# Altium PCB 拼版.PcbDoc (part 2 of 3)
Units mm, origin at the board's own origin, x right, y up, seen from the top; angles counter-clockwise.
Board outline 152.4 x 101.6 mm, 4 copper layers (Top Layer, Mid-Layer 1, Mid-Layer 2, Bottom Layer); 303 components, 0 nets, 1078 pads, 478 vias.
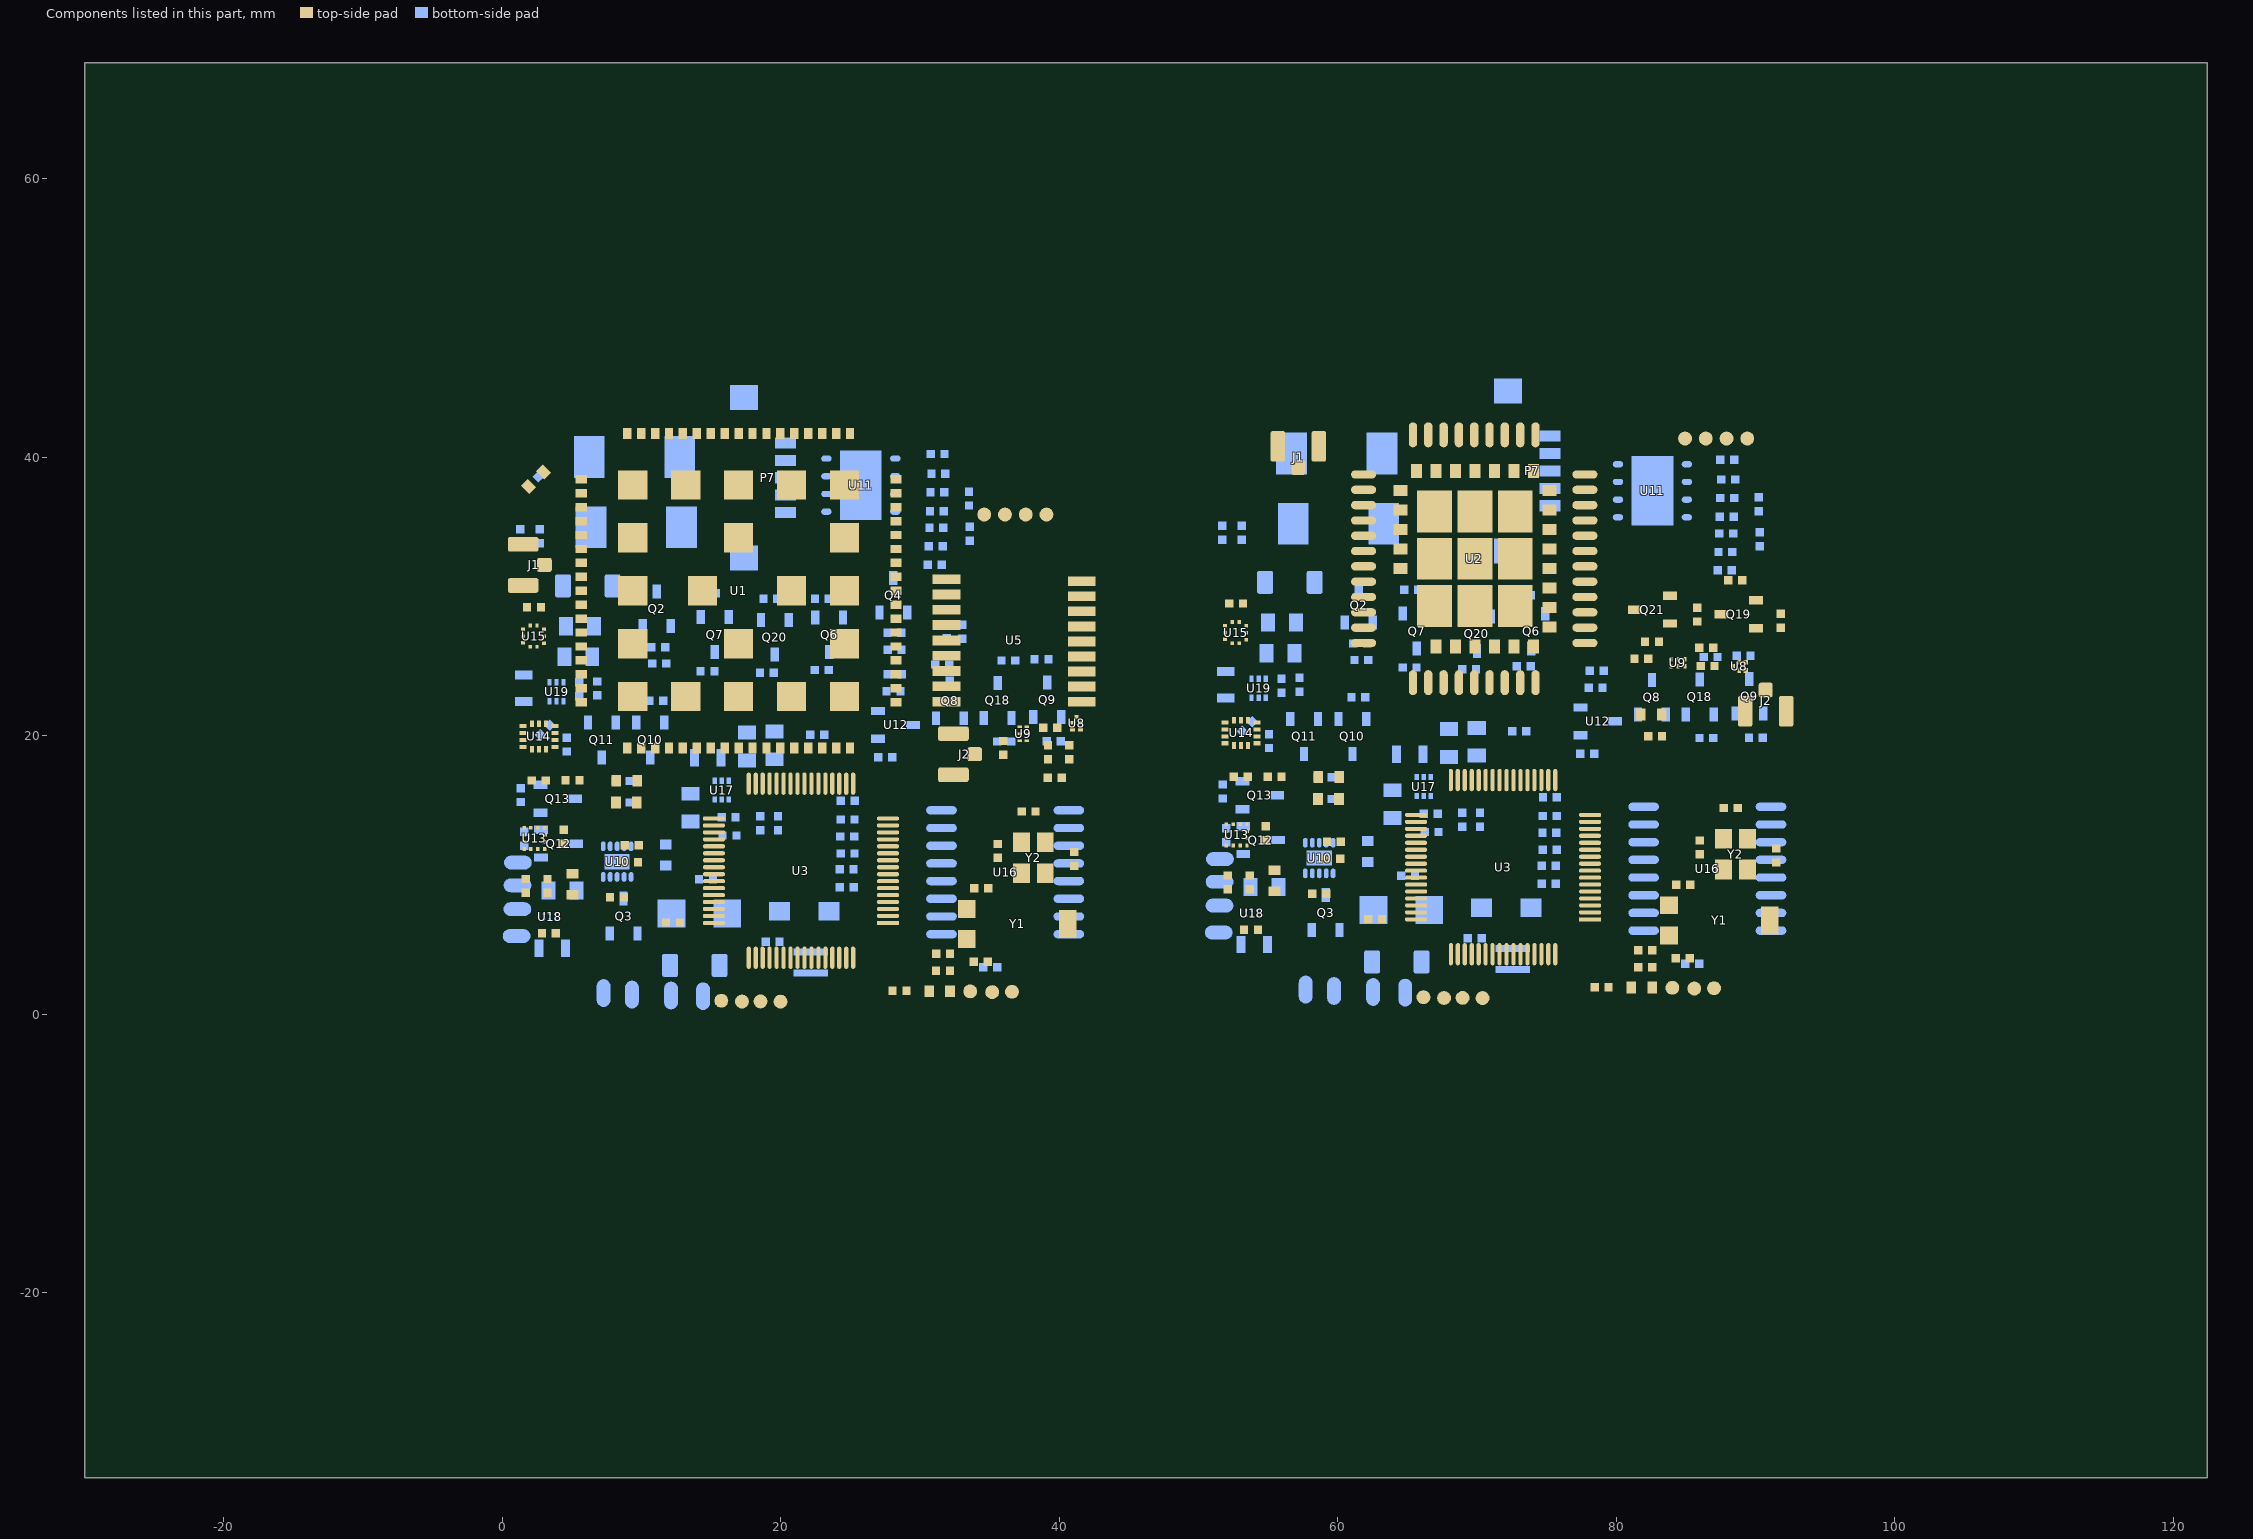
[diagram p4: the components of this part, seen from the top]

## Via types
v1: diameter 0.508, hole 0.305, Top Layer to Bottom Layer, tented both sides, 421 vias
v2: diameter 0.762, hole 0.508, Top Layer to Bottom Layer, tented both sides, 43 vias
v3: diameter 1.016, hole 0.635, Top Layer to Bottom Layer, tented both sides, 14 vias

## Nets (pads, with @x,y where several pads share a name; then routed paths per layer and width w, separated by ;. In a path a pad name is that pad's centre, name@x,y a point inside that pad or via, vN(x,y) a via of type N, cw(c..) or ccw(c..) an arc to the next point about the centre after c; other vN are vias at no path point) (continued)
copper on no net: | length 3569.3
  Top Layer w0.127: 8.805,12.144 v1(8.805,12.982) ; 9.687,16.781 10.379,16.781 ; 10.043,15.211 9.664,15.211 9.682,15.229 10.248,15.229 v1(10.667,14.81) ; 10.657,16.503 10.379,16.781 ; v1(11.082,16.078) 10.379,16.781 ; 59.224,12.398 v1(59.224,13.236) ; 60.106,17.035 60.798,17.035 ; 60.462,15.465 60.083,15.465 60.101,15.483 60.667,15.483 v1(61.086,15.064) ; 61.076,16.757 60.798,17.035 ; v1(61.501,16.332) 60.798,17.035
  Top Layer w0.152: v1(0.795,12.255) 1.179,11.871 1.562,11.871 1.562,9.834 1.676,9.72 ; v1(1.59,21.536) 2.133,20.994 2.133,20.869 ; v1(2.483,7.739) 3.851,6.371 3.851,5.829 ; v1(2.495,25.941) 2.495,26.401 ; 2.633,20.869 v1(2.633,21.374) ; 3.007,27.164 v1(3.413,27.164) ; 3.062,11.871 3.342,11.871 v1(4.066,11.147) 3.251,10.332 3.251,9.72 ; 11.76,6.593 12.39,7.223 13.869,7.223 14.024,7.067 15.201,7.067 ; v1(12.061,9.182) 12.176,9.067 15.201,9.067 ; v1(12.42,9.741) 12.594,9.567 15.201,9.567 ; 15.201,8.567 16.02,8.567 17.522,10.069 v1@18.505,10.069 ; v1(18.201,2.609) 18.201,4.067 18.201,3.395 ; 19.701,16.567 19.701,14.662 19.334,14.295 19.334,12.195 v1(21.311,10.217) ; v1(20.701,2.224) 20.701,4.067 ; 21.201,16.567 21.201,15.343 20.694,14.837 20.694,11.792 v1(21.207,11.279) ; v1(21.214,11.937) 21.214,14.823 21.701,15.31 21.701,16.567 ; 21.701,4.067 21.701,2.324 v1(22.005,2.019) ; v1(22.373,12.642) 23.325,13.594 24.334,13.594 24.861,13.067 27.64,13.067 ; 23.201,4.067 23.201,2.579 24.088,1.691 28.027,1.691 ; 24.201,4.067 24.201,3.287 24.573,2.915 29.035,2.915 29.41,2.915 30.661,1.664 ; v1(26.08,9.506) 26.141,9.567 27.701,9.567 ; 27.64,13.006 27.701,13.067 ; 27.701,7.567 30.119,7.567 31.17,6.516 32.336,6.516 33.36,5.492 33.36,5.413 33.36,4.276 33.853,3.783 ; 27.701,8.067 30.392,8.067 31.529,6.93 32.131,6.93 32.773,7.572 33.36,7.572 33.36,8.526 33.894,9.059 ; 27.701,8.567 29.829,8.567 32.851,11.589 35.231,11.589 35.585,11.235 37.896,11.235 38.992,10.139 40.562,10.139 41.079,10.656 ; 27.701,9.067 27.785,9.067 ; 27.724,9.006 27.785,9.067 ; 32.154,4.348 32.629,4.348 33.025,3.953 33.025,3.261 33.258,3.028 34.625,3.028 34.853,3.257 34.853,3.783 ; 37.295,14.566 37.295,12.372 37.279,12.356 35.706,12.356 35.585,12.235 35.447,12.235 35.142,11.929 32.735,11.929 29.873,9.067 27.785,9.067 ; v1(40.275,22.455) 41.614,22.455 ; 40.96,20.457 40.96,20.932 41.534,20.932 v1(42.003,20.932) ; v1(51.214,12.509) 51.598,12.125 51.981,12.125 51.981,10.088 52.095,9.974 ; v1(52.009,21.79) 52.552,21.248 52.552,21.123 ; v1(52.902,7.993) 54.27,6.625 54.27,6.083 ; v1(52.914,26.195) 52.914,26.655 ; 53.052,21.123 v1(53.052,21.628) ; 53.426,27.418 v1(53.832,27.418) ; 53.481,12.125 53.761,12.125 v1(54.485,11.401) 53.67,10.586 53.67,9.974 ; 62.179,6.847 62.809,7.477 64.288,7.477 64.443,7.321 65.62,7.321 ; v1(62.48,9.436) 62.595,9.321 65.62,9.321 ; v1(62.839,9.995) 63.013,9.821 65.62,9.821 ; 65.62,8.821 66.439,8.821 67.941,10.323 v1@68.924,10.323 ; 66.949,36.12 69.849,36.12 ; 67.049,26.42 67.049,29.22 66.949,29.32 ; v1(68.62,2.863) 68.62,4.321 68.62,3.649 ; 70.12,16.821 70.12,14.916 69.753,14.549 69.753,12.449 v1(71.73,10.471) ; v1(71.12,2.478) 71.12,4.321 ; 71.249,26.42 72.649,26.42 72.649,29.22 72.749,29.32 ; 71.62,16.821 71.62,15.597 71.113,15.091 71.113,12.046 v1(71.626,11.533) ; v1(71.633,12.191) 71.633,15.077 72.12,15.564 72.12,16.821 ; 72.12,4.321 72.12,2.578 v1(72.424,2.273) ; v1(72.792,12.896) 73.744,13.848 74.753,13.848 75.28,13.321 78.059,13.321 ; 73.62,4.321 73.62,2.833 74.507,1.945 78.446,1.945 ; 74.62,4.321 74.62,3.541 74.992,3.169 79.454,3.169 79.829,3.169 81.08,1.918 ; 75.2,30.629 74.059,30.629 72.749,29.32 ; v1(76.499,9.76) 76.56,9.821 78.12,9.821 ; 78.059,13.26 78.12,13.321 ; 78.12,7.821 80.538,7.821 81.589,6.77 82.755,6.77 83.779,5.746 83.779,5.667 83.779,4.53 84.272,4.037 ; 78.12,8.321 80.811,8.321 81.948,7.184 82.55,7.184 83.192,7.826 83.779,7.826 83.779,8.78 84.313,9.313 ; 78.12,8.821 80.248,8.821 83.27,11.843 85.65,11.843 86.004,11.489 88.315,11.489 89.411,10.393 90.981,10.393 91.498,10.91 ; 78.12,9.321 78.204,9.321 ; 78.143,9.26 78.204,9.321 ; 82.573,4.602 83.048,4.602 83.444,4.207 83.444,3.515 83.677,3.282 85.044,3.282 85.272,3.511 85.272,4.037 ; 83.93,24.998 84.43,24.998 ; 87.714,14.82 87.714,12.626 87.698,12.61 86.125,12.61 86.004,12.489 85.866,12.489 85.561,12.183 83.154,12.183 80.292,9.321 78.204,9.321 ; 88.817,25.281 88.817,24.706 89.292,24.706 ; 66.949,29.32 69.849,29.32 ; 66.949,29.32 66.949,32.72 69.849,32.72 ; 69.849,29.32 69.849,32.72 ; 69.849,29.32 72.749,29.32 ; 69.849,32.72 69.849,36.12 ; 69.849,32.72 72.749,32.72 ; 69.849,36.12 72.749,36.12 72.749,32.72 ; 72.749,29.32 72.749,32.72
  Top Layer w0.203: v1@2.337,6.735 v1(2.252,6.82) 2.252,6.428 2.851,5.829 ; 2.953,38.964 4.255,40.266 5.238,40.266 5.673,39.83 5.673,38.42 ; v1(7.222,16.27) 7.733,16.781 8.187,16.781 ; v1(7.75,13.017) 7.75,11.969 8.748,10.971 8.748,10.912 ; v1(8.139,15.894) 8.139,15.236 8.164,15.211 ; 8.741,8.401 9.891,7.251 ; 9.805,12.144 10.417,12.144 v1(10.491,12.069) ; v1(11.116,13.294) 12.344,12.067 15.201,12.067 ; v1@11.691,13.555 v1(11.691,13.674) 12.798,12.567 15.201,12.567 ; v1(11.874,14.428) 13.235,13.067 15.201,13.067 ; 15.201,8.067 16.361,8.067 v1(17.373,9.079) ; v1(17.685,13.207) 17.701,13.222 17.701,16.567 ; 19.201,4.067 19.201,2.947 v1(19.908,2.239) ; 22.201,16.567 22.201,15.306 21.561,14.666 21.561,12.693 22.262,11.992 v1(22.798,11.992) ; 24.201,16.567 24.201,17.377 25.204,18.381 v2(25.925,18.381) ; v1(24.332,6.225) 25.201,5.356 25.201,4.067 ; 25.24,4.028 25.201,3.988 27.548,3.988 27.908,4.348 31.154,4.348 31.154,3.124 31.152,3.122 ; v1(26.967,31.91) 27.458,31.42 28.273,31.42 ; v1(27.514,32.42) 28.273,32.42 ; 27.701,12.567 v1@29.082,12.567 ; v1(30.328,26.863) 30.336,26.855 31.914,26.855 ; 37.663,20.148 37.988,20.148 v1(38.358,19.779) ; v1(40.243,25.629) 40.312,25.698 41.614,25.698 ; v1@52.756,6.989 v1(52.671,7.074) 52.671,6.682 53.27,6.083 ; v1(57.641,16.524) 58.152,17.035 58.606,17.035 ; v1(58.169,13.271) 58.169,12.223 59.167,11.225 59.167,11.166 ; v1(58.558,16.148) 58.558,15.49 58.583,15.465 ; 59.16,8.655 60.31,7.505 ; v1@60.21,35.47 61.849,35.47 ; 60.224,12.398 60.836,12.398 v1(60.91,12.323) ; v1(60.253,34.37) 61.849,34.37 ; v1(61.535,13.548) 62.763,12.321 65.62,12.321 ; v1@62.11,13.809 v1(62.11,13.928) 63.217,12.821 65.62,12.821 ; v1(62.293,14.682) 63.654,13.321 65.62,13.321 ; 65.62,8.321 66.78,8.321 v1(67.792,9.333) ; v1@68.12,13.476 68.12,16.821 ; 69.62,4.321 69.62,3.201 v1(70.327,2.493) ; 72.62,16.821 72.62,15.56 71.98,14.92 71.98,12.947 72.681,12.246 v1(73.217,12.246) ; 73.099,23.82 73.099,22.836 73.66,22.276 79.172,22.276 79.629,22.733 81.229,22.733 81.763,22.2 81.763,21.615 81.763,21.539 ; 74.62,16.821 74.62,17.631 75.623,18.635 v2(76.344,18.635) ; v1(74.751,6.479) 75.62,5.61 75.62,4.321 ; 75.659,4.282 75.62,4.242 77.967,4.242 78.327,4.602 81.573,4.602 81.573,3.378 81.571,3.376 ; 78.12,12.821 v1@79.501,12.821 ; v1(79.654,29.388) 79.975,29.067 81.345,29.067 81.345,28.357 82.067,27.635 82.067,26.746 ; 82.305,25.527 83.9,25.527 83.93,25.498 ; 84.93,24.998 86.034,24.998 86.055,25.019 ; 89.036,31.166 v1(89.891,31.166)
  Top Layer w0.254: v1(0.9,20.209) 1.483,20.209 ; v1(1.089,28.337) 1.089,28.057 1.482,27.664 1.482,27.164 ; 1.483,19.709 1.483,20.709 ; 1.562,13.396 2.062,13.396 ; 1.676,8.72 2.577,8.72 ; 1.893,37.903 v1(2.572,37.224) ; 1.995,26.401 1.762,26.401 1.482,26.681 0.354,26.681 0.336,26.699 ; 2.098,16.812 1.7,17.211 1.7,17.365 ; 2.113,16.463 2.113,15.908 ; 2.133,19.049 2.133,18.938 1.7,18.505 1.7,17.365 ; 2.495,27.926 2.495,28.284 1.778,29.001 1.778,29.246 1,29.246 0.336,28.582 0.336,26.699 ; 2.562,13.396 2.562,13.133 2.812,12.883 3.075,12.883 3.676,12.883 4.052,13.259 4.411,13.259 ; 3.007,26.664 3.007,26.29 v1(3.4,25.897) ; 3.007,27.664 3.157,27.813 v1(3.157,28.388) ; 3.075,12.383 3.664,12.383 3.788,12.259 4.411,12.259 ; 3.113,16.797 3.113,16.813 2.113,17.813 2.113,18.327 2.633,18.847 2.633,19.049 3.133,19.049 ; 3.133,20.869 3.133,21.208 3.781,21.857 3.781,22.933 3.375,23.339 2.112,23.339 1.757,22.984 0.371,22.984 0.336,22.949 ; 3.351,8.72 3.251,8.72 ; 3.351,8.82 3.251,8.72 ; 4.544,16.811 4.544,16.356 4.544,15.375 v1(5.321,14.598) ; 5.037,10.094 4.916,10.094 3.745,8.922 3.453,8.922 3.251,8.72 ; 5.544,16.811 5.583,16.851 5.583,17.91 ; 5.583,17.379 5.583,17.91 ; v1(8.071,17.919) 8.476,17.919 8.973,18.416 8.973,19.12 ; 10.973,19.12 10.973,19.681 11.135,19.843 ; 11.973,19.12 11.973,18.322 v1(12.407,17.889) ; v1@12.253,20.961 11.135,19.843 ; v1(12.424,21.132) 11.135,19.843 ; v1(14.788,17.858) 15.567,17.858 17.807,17.858 18.201,17.464 18.201,16.567 ; 15.201,7.067 17.142,7.067 v1(17.934,6.274) ; 15.201,7.567 17.757,7.567 v1(18.195,7.129) ; v1(16.067,20.53) 16.973,19.624 16.973,19.12 ; 17.701,4.067 17.688,4.054 17.688,1.961 18.544,1.105 18.544,0.932 ; 17.973,19.12 17.973,20.809 v1(18.546,21.382) ; v1(22.138,14.028) 22.848,14.028 23.201,14.38 23.201,16.567 ; 22.185,4.016 v1(22.185,6.08) ; v1(22.687,14.643) 22.701,14.657 22.701,16.567 ; 22.701,4.067 22.701,5.65 v1(22.702,5.652) ; 22.973,19.12 22.973,20.219 23.243,20.489 23.829,20.489 v1(23.842,20.475) ; v1(23.335,6.237) 24.701,4.872 24.701,4.067 ; 23.973,19.12 23.973,19.717 24.63,20.373 v1(24.63,20.8) ; 24.701,16.567 24.701,14.916 24.967,14.649 25.456,14.649 v1(25.77,14.963) ; 25.201,16.567 26.412,16.567 v1(26.979,17.133) ; v1@25.266,11.963 25.266,10.813 26.013,10.067 27.701,10.067 ; v1(25.89,5.036) 25.89,5.846 26.61,6.567 27.701,6.567 ; v1(26.453,11.913) 26.606,12.067 27.701,12.067 ; v1(26.502,13.567) 27.701,13.567 ; 27.701,14.067 27.701,16.476 v1@28.223,16.998 ; 28.273,28.42 v1(29.985,28.42) ; 28.273,35.42 28.836,35.42 28.936,35.319 v1(29.515,35.319) ; 28.273,36.42 28.851,36.42 29.218,36.787 30.414,36.787 31.021,36.179 31.231,35.97 32.086,35.97 32.713,36.597 32.713,38.648 v1(31.822,39.54) ; 28.273,37.42 31.136,37.42 v1(31.752,36.804) ; 31.914,29.055 v1(33.907,29.055) ; 31.914,30.155 34.332,30.155 v1(34.87,29.617) ; 32.152,3.122 32.161,3.114 32.161,1.664 ; 34.61,35.891 35.103,35.397 v1(35.103,34.817) ; 35.966,19.634 37.148,19.634 37.163,19.648 ; 37.163,20.148 37.163,20.648 37.163,22.072 v1(37.344,22.253) ; 37.663,19.648 37.663,18.708 38.043,18.327 39.187,18.327 ; 37.663,20.648 38.774,20.648 38.85,20.573 ; v1(38.365,19.036) 38.657,19.327 39.187,19.327 ; 39.482,22.876 ccw(c41.001,22.876) 41.244,21.377 ; 39.85,20.573 40.39,20.032 41.363,20.032 41.535,20.204 41.535,20.457 ; v1(51.319,20.463) 51.902,20.463 ; v1(51.508,28.591) 51.508,28.311 51.901,27.918 51.901,27.418 ; 51.902,19.963 51.902,20.963 ; 51.981,13.65 52.481,13.65 ; 52.095,8.974 52.996,8.974 ; 52.414,26.655 52.181,26.655 51.901,26.935 50.773,26.935 50.755,26.953 ; 52.517,17.066 52.119,17.465 52.119,17.619 ; 52.532,16.717 52.532,16.162 ; 52.552,19.303 52.552,19.192 52.119,18.759 52.119,17.619 ; 52.914,28.18 52.914,28.538 52.197,29.255 52.197,29.5 51.419,29.5 50.755,28.836 50.755,26.953 ; 52.981,13.65 52.981,13.387 53.231,13.137 53.494,13.137 54.095,13.137 54.471,13.513 54.83,13.513 ; 53.426,26.918 53.426,26.544 v1(53.819,26.151) ; 53.426,27.918 53.576,28.067 v1(53.576,28.642) ; 53.494,12.637 54.083,12.637 54.207,12.513 54.83,12.513 ; 53.532,17.051 53.532,17.067 52.532,18.067 52.532,18.581 53.052,19.101 53.052,19.303 53.552,19.303 ; 53.552,21.123 53.552,21.462 54.2,22.111 54.2,23.187 53.794,23.593 52.531,23.593 52.176,23.238 50.79,23.238 50.755,23.203 ; 53.77,8.974 53.67,8.974 ; 53.77,9.074 53.67,8.974 ; 54.963,17.065 54.963,16.61 54.963,15.629 v1(55.74,14.852) ; 55.456,10.348 55.335,10.348 54.164,9.176 53.872,9.176 53.67,8.974 ; 55.963,17.065 56.002,17.105 56.002,18.164 ; 56.002,17.633 56.002,18.164 ; v1(60.122,36.551) 60.141,36.57 61.849,36.57 ; v1(65.207,18.112) 65.986,18.112 68.226,18.112 68.62,17.718 68.62,16.821 ; 65.62,7.321 67.561,7.321 v1(68.353,6.528) ; 65.62,7.821 68.176,7.821 v1(68.614,7.383) ; 68.12,4.321 68.107,4.308 68.107,2.215 68.963,1.359 68.963,1.186 ; v1(68.809,22.327) 68.809,22.276 69.393,21.692 70.663,21.692 70.899,21.928 70.899,23.82 ; 71.999,41.62 71.999,40.396 v2(72.009,40.386) ; v1(72.557,14.282) 73.267,14.282 73.62,14.634 73.62,16.821 ; 72.604,4.27 v1(72.604,6.334) ; 73.12,4.321 73.12,5.904 v1(73.121,5.906) ; v1@73.12,14.911 73.12,16.821 ; v1(73.754,6.491) 75.12,5.126 75.12,4.321 ; 75.12,16.821 75.12,15.17 75.386,14.903 75.875,14.903 v1(76.189,15.217) ; 75.62,16.821 76.831,16.821 v1(77.398,17.387) ; v1@75.685,12.217 75.685,11.067 76.432,10.321 78.12,10.321 ; v1(76.309,5.29) 76.309,6.1 77.029,6.821 78.12,6.821 ; v1(76.872,12.167) 77.025,12.321 78.12,12.321 ; v1(76.921,13.821) 78.12,13.821 ; 77.749,26.67 v1(79.019,26.67) ; 77.749,27.77 v1(79.662,27.77) v1@79.68,27.788 ; 77.749,32.17 77.787,32.207 79.299,32.207 79.502,32.004 v1(79.502,31.267) ; 77.749,33.27 79.752,33.27 v1(79.781,33.299) ; 78.12,14.321 78.12,16.73 v1@78.642,17.252 ; 82.571,3.376 82.58,3.368 82.58,1.918 ; 83.067,26.746 85.09,26.746 85.522,26.314 85.97,26.314 ; 83.263,21.539 83.263,19.988 83.287,19.964 ; 83.845,30.067 85.071,30.067 v1(85.09,30.048) ; 84.43,25.498 v1(84.43,26.137) ; 84.93,25.498 84.93,25.781 85.436,25.781 85.97,26.314 ; 84.938,41.351 v1(84.938,42.418) ; 85.827,26.772 v1@85.827,27.254 ; 85.827,28.21 v1@85.827,27.254 ; 87.055,25.019 88.367,25.019 88.392,24.994 ; 87.543,28.737 87.543,29.91 87.935,30.302 87.935,31.064 88.036,31.166 ; v1(88.925,29.693) 88.97,29.737 90.043,29.737 ; 90.043,27.737 91.796,27.737 91.821,27.762 ; 91.862,28.804 91.821,28.762 89.544,28.762 88.036,27.254 v1@85.827,27.254 ; 0.336,22.949 0.336,26.699 ; 0.336,22.949 0.336,18.021 0.991,17.365 1.7,17.365 ; 2.062,13.396 2.062,12.955 2.562,12.455 2.562,11.871 2.562,8.734 2.577,8.72 ; 2.062,13.396 2.113,13.447 2.113,15.908 ; 2.113,15.908 2.87,15.908 2.873,15.911 3.518,15.911 3.823,16.216 3.823,18.363 3.783,18.403 3.783,19.209 4.284,19.209 5.583,17.91 ; 2.577,8.72 3.251,8.72 ; 50.755,23.203 50.755,26.953 ; 50.755,23.203 50.755,18.275 51.41,17.619 52.119,17.619 ; 52.481,13.65 52.481,13.209 52.981,12.709 52.981,12.125 52.981,8.988 52.996,8.974 ; 52.481,13.65 52.532,13.701 52.532,16.162 ; 52.532,16.162 53.289,16.162 53.292,16.165 53.937,16.165 54.242,16.47 54.242,18.617 54.202,18.657 54.202,19.463 54.703,19.463 56.002,18.164 ; 52.996,8.974 53.67,8.974 ; v1@85.827,27.254 85.827,26.457 85.97,26.314
  Top Layer w0.381: 12.76,6.567 15.201,6.567 15.201,5.702 v2(15.609,5.294) ; 28.273,34.42 29.398,34.42 29.8,34.018 v1(29.8,32.297) ; 39.482,22.876 cw(c40.142,22.876) 40.142,23.536 41.614,23.536 ; v1(39.867,26.734) 39.912,26.779 41.614,26.779 ; 40.706,19.313 41.629,19.313 v1(41.905,19.038) ; 63.179,6.821 65.62,6.821 65.62,5.956 v2(66.028,5.548) ; 74.049,26.42 74.942,25.527 81.305,25.527 ; 83.845,28.219 83.845,28.067 84.506,28.067 84.836,28.397 84.836,28.702 84.836,28.804 85.242,29.21 85.827,29.21 ; 89.292,25.281 cw(c89.292,23.844) 90.729,23.844 90.729,23.293
  Top Layer w0.508: 3.029,32.275 4.025,31.279 ccw(c4.044,31.298) 4.044,31.272 4.346,30.97 ccw(c5.673,32.297) 5.673,30.42 ; v2@5.037,7.391 5.037,8.594 ; 19.98,0.911 v1@23.023,0.911 ; v2@30.553,23.555 31.914,23.555 ; 33.924,18.682 33.973,18.634 35.966,18.634 ; 39.182,16.998 39.187,17.003 39.187,18.327 40.692,18.327 40.706,18.313 ; v2@55.456,7.645 55.456,8.848 ; 57.167,39.017 57.167,39.262 57.167,38.449 ccw(c59.707,38.449) 57.911,36.653 58.445,36.119 cw(c57.096,34.77) 59.004,34.77 59.004,29.463 ccw(c61.086,29.463) 59.614,27.991 ccw(c60.147,28.524) 59.751,27.882 ccw(c60.147,28.524) 60.147,27.77 61.849,27.77 ; 70.399,1.165 v1@73.442,1.165 ; 71.999,23.82 71.999,21.396 72.667,20.729 v1(74.261,20.729)
  Mid-Layer 1 w0.152: v1(1.59,21.536) 2.933,20.194 2.933,18.258 6.416,14.774 8.557,14.774 11.421,11.911 11.421,9.822 v1(12.061,9.182) ; v1(2.633,21.374) 3.401,20.605 3.401,18.223 6.516,15.107 8.634,15.107 11.975,11.766 11.975,10.185 v1(12.42,9.741) ; v1(18.201,2.609) 17.468,3.341 17.468,4.47 20.181,7.184 31.909,7.184 34.601,9.875 34.601,11.765 v1(32.986,13.38) ; v1(18.52,10.054) 20.79,7.785 27.25,7.785 31.962,7.785 34.23,10.053 34.23,11.443 32.271,13.402 32.271,13.935 v1(32.986,14.65) ; v1(20.701,2.224) 21.53,1.394 22.203,1.394 24.722,3.914 33.515,3.914 35.39,5.789 v1(38.887,5.789) ; v1(21.311,10.217) 21.816,10.217 21.973,10.375 v1(33.579,10.375) ; v1(22.005,2.019) 24.403,4.417 33.164,4.417 35.115,6.369 38.145,6.369 v1(38.806,7.03) ; v1(52.009,21.79) 53.352,20.448 53.352,18.512 56.835,15.028 58.976,15.028 61.84,12.165 61.84,10.076 v1(62.48,9.436) ; v1(53.052,21.628) 53.82,20.859 53.82,18.477 56.935,15.361 59.053,15.361 62.394,12.02 62.394,10.439 v1(62.839,9.995) ; v1(68.62,2.863) 67.887,3.595 67.887,4.724 70.6,7.438 82.328,7.438 85.02,10.129 85.02,12.019 v1(83.405,13.634) ; v1(68.939,10.308) 71.209,8.039 77.669,8.039 82.381,8.039 84.649,10.307 84.649,11.697 82.69,13.656 82.69,14.189 v1(83.405,14.904) ; v1(71.12,2.478) 71.949,1.648 72.622,1.648 75.141,4.168 83.934,4.168 85.809,6.043 v1(89.306,6.043) ; v1(71.73,10.471) 72.235,10.471 72.392,10.629 v1(83.998,10.629) ; v1(72.424,2.273) 74.822,4.671 83.583,4.671 85.534,6.623 88.564,6.623 v1(89.225,7.284)
  Mid-Layer 1 w0.203: v1(2.252,6.82) 6.176,2.896 12.012,2.896 17.373,8.257 v1(17.373,9.079) ; v1(6.529,16.859) 9.443,16.859 v1(11.874,14.428) ; v1(19.908,2.239) 20.875,1.272 ; 20.557,1.59 20.875,1.272 ; v1(22.798,11.992) 23.932,11.992 27.011,15.071 30.154,15.071 31.799,16.715 37.665,16.715 v1(38.925,15.455) ; v1(35.303,4.554) 34.124,3.375 24.758,3.375 22.44,1.058 21.09,1.058 20.875,1.272 ; v1(52.671,7.074) 56.595,3.15 62.431,3.15 67.792,8.511 v1(67.792,9.333) ; v1(56.948,17.113) 59.862,17.113 v1(62.293,14.682) ; v1(64.719,31.953) 67.285,29.388 v1(79.654,29.388) ; v1(70.327,2.493) 71.294,1.526 ; 70.976,1.844 71.294,1.526 ; v1(73.217,12.246) 74.351,12.246 77.43,15.325 80.573,15.325 82.218,16.969 88.084,16.969 v1(89.344,15.709) ; v1(85.722,4.808) 84.543,3.629 75.177,3.629 72.859,1.312 71.509,1.312 71.294,1.526
  Mid-Layer 1 w0.254: v1(9.711,24.949) 25.519,24.949 v1(26.151,24.317) ; v1(18.891,40.485) 28.071,40.485 28.102,40.455 v1(31.752,36.804) ; v1(19.008,36.157) 18.572,36.157 17.664,37.064 17.664,40.621 18.235,41.192 30.169,41.192 v1(31.822,39.54) ; v1(19.041,37.265) 21.017,39.242 25.592,39.242 v1(29.515,35.319) ; v1(22.475,38.641) 21.799,37.965 21.799,36.031 23.807,34.023 24.923,34.023 v1(32.774,34.023) ; v1(22.562,37.371) 25.256,34.677 31.787,34.677 33.52,36.41 v1(33.52,38.231) ; v1@22.701,5.675 33.785,5.675 v1(34.929,6.819) ; v1(23.842,20.475) 23.842,20.904 25.699,22.76 35.2,22.76 35.639,22.321 v1(35.639,20.349) v1@35.639,20.194 ; v1(25.427,20.609) 26.958,22.14 v1(34.611,22.14) ; v1(58.963,25.03) 59.584,24.409 68.351,24.409 68.809,23.952 v1(68.809,22.327) 69.24,21.895 70.917,21.895 71.984,22.962 78.207,22.962 81.382,26.137 v1(84.43,26.137) ; v1(60.13,25.203) 75.938,25.203 v1(76.57,24.571) ; v1(63.779,31.09) 63.779,33.604 64.389,34.214 65.405,34.214 68.885,30.734 78.969,30.734 v1(79.502,31.267) ; v1(64.719,33.299) 67.894,30.124 82.677,30.124 83.439,30.886 87.732,30.886 v1(88.925,29.693) ; v1(67.818,22.301) 69.39,20.729 v1(74.261,20.729) 74.746,20.244 85.699,20.244 v1(86.058,20.603) ; v2(69.809,40.386) 69.809,38.751 76.479,32.08 90.399,32.08 91.516,33.198 91.516,38.43 90.108,39.838 88.476,39.838 87.808,39.17 87.808,37.719 88.494,37.033 v1(88.494,36.398) ; v1(69.952,22.454) 69.952,22.936 70.587,23.571 77.191,23.571 79.68,26.06 ; v2(70.909,40.386) 70.909,38.565 76.784,32.69 90.119,32.69 91.135,33.706 91.135,37.897 90.297,38.735 88.938,38.735 v1(88.54,39.133) ; v2(72.009,40.386) 72.009,39.141 76.784,34.366 80.543,34.366 81.712,33.198 86.411,33.198 v1(86.462,33.249) ; v1@73.12,5.929 84.204,5.929 v1(85.348,7.073) ; v1(75.846,20.863) 84.44,20.863 85.03,21.454 v1(85.03,22.394) ; v1(79.193,38.234) 78.638,38.234 78.232,37.828 78.232,36.449 79.731,34.95 81.051,34.95 82.245,33.757 89.353,33.757 v1(89.492,33.617) ; v1(79.28,36.964) 79.901,36.964 82.728,34.138 89.129,34.138 90.238,35.247 v1(90.238,37.825) ; 79.68,26.619 79.68,26.06 ; v1@79.68,27.788 79.68,26.06 ; v1(85.877,27.33) 86.058,27.15 v1(86.058,20.603) ; v1@86.058,20.448 v1(86.058,20.603) ; v1@89.469,33.594 v1@89.484,33.579
  Mid-Layer 1 w0.381: v1(16.422,40.552) 17.98,42.11 31.062,42.11 34.498,38.675 34.498,34.452 32.343,32.297 v1(29.8,32.297) ; v2(68.709,40.386) 68.709,41.353 69.72,42.364 83.518,42.364 85.903,39.98 v1@85.903,35.694
  Mid-Layer 1 w0.508: v2(1.391,14.176) 2.769,12.799 2.769,8.371 v2(3.287,7.852) ; v2(5.097,7.391) 6.678,7.391 7.961,6.109 12.649,6.109 18.179,11.639 18.179,12.713 v1(17.685,13.207) 17.685,17.206 18.859,18.381 v2(25.925,18.381) ; v1(24.769,2.375) v2@26.485,2.375 ; v2(51.81,14.43) 53.188,13.053 53.188,8.625 v2(53.706,8.106) ; v2(55.516,7.645) 57.097,7.645 58.38,6.363 63.068,6.363 68.598,11.893 68.598,12.967 v1(68.104,13.461) 68.104,17.46 69.278,18.635 v2(76.344,18.635) ; v1(75.188,2.629) v2@76.904,2.629
  Mid-Layer 1 w0.762: v2(25.925,18.381) 27.397,19.852 v2(30.208,19.852) ; v2(76.344,18.635) 77.619,18.635 78.313,19.329 80.391,19.329 v2(81.026,18.694)
  Mid-Layer 1 w1.016: v2(54.712,35.839) 54.712,33.63 55.562,32.779 55.562,24.27 57.125,22.708 v2@66.446,22.708
  Mid-Layer 1 w1.27: v3(6.425,13.072) 6.425,10.855 10.029,7.251 v3(10.444,7.251) ; v3(56.844,13.326) 56.844,11.109 60.448,7.505 v3(60.863,7.505)
  Mid-Layer 2 w0.127: v1(10.156,8.618) 10.156,9.27 11.029,10.142 11.029,11.628 11.328,11.928 11.328,12.418 10.449,13.297 10.449,14.593 v1(10.667,14.81) ; v1(10.78,9.157) 11.42,9.797 11.42,11.523 12.588,12.691 12.588,15.025 11.535,16.078 v1(11.082,16.078) ; v1(60.575,8.872) 60.575,9.524 61.448,10.396 61.448,11.882 61.747,12.182 61.747,12.672 60.868,13.551 60.868,14.847 v1(61.086,15.064) ; v1(61.199,9.411) 61.839,10.051 61.839,11.777 63.007,12.945 63.007,15.279 61.954,16.332 v1(61.501,16.332)
  Mid-Layer 2 w0.152: v1(0.795,12.255) 0.56,12.49 0.56,18.183 0.924,18.547 ; 0.842,18.465 0.924,18.547 ; v1@1.59,21.524 1.229,21.524 0.734,22.019 0.734,25.458 2.44,27.164 v1(3.413,27.164) ; v1(1.59,21.536) 1.877,21.249 1.877,20.095 0.273,18.492 0.273,10.976 1.341,9.909 2.827,9.909 v1(4.066,11.147) ; 2.017,25.614 2.168,25.614 ; v1(2.495,25.941) 2.168,25.614 ; v1(21.207,11.279) 27.782,4.704 28.906,3.58 33.196,3.58 v1(35.183,1.593) ; v1(21.214,11.937) 29.13,4.021 34.14,4.021 34.203,4.021 v1(36.602,1.622) ; v1(51.214,12.509) 50.979,12.744 50.979,18.437 51.343,18.801 ; 51.261,18.719 51.343,18.801 ; v1@52.009,21.778 51.648,21.778 51.153,22.273 51.153,25.712 52.859,27.418 v1(53.832,27.418) ; v1(52.009,21.79) 52.296,21.503 52.296,20.349 50.692,18.746 50.692,11.23 51.76,10.163 53.246,10.163 v1(54.485,11.401) ; 52.436,25.868 52.587,25.868 ; v1(52.914,26.195) 52.587,25.868 ; v1(71.626,11.533) 78.201,4.958 79.325,3.834 83.615,3.834 v1(85.602,1.847) ; v1(71.633,12.191) 79.549,4.275 84.559,4.275 84.622,4.275 v1(87.021,1.876) ; 0.924,18.547 2.633,20.255 v1(2.633,21.374) 1.158,22.848 1.158,24.604 2.168,25.614 ; 51.343,18.801 53.052,20.509 v1(53.052,21.628) 51.577,23.102 51.577,24.858 52.587,25.868
  Mid-Layer 2 w0.203: v1(26.967,31.91) 29.005,29.873 31.171,29.873 34.693,33.395 35.716,33.395 37.037,34.716 37.037,35.309 v1@37.588,35.86 ; v1(27.514,32.42) 29.46,30.474 31.07,30.474 34.443,33.846 35.521,33.846 36.619,34.945 36.619,35.376 v1@36.148,35.847 ; v1(38.358,19.779) 38.358,24.59 39.398,25.629 v1(40.243,25.629) ; v1(60.173,35.433) 59.665,34.925 59.665,33.807 59.823,33.649 60.396,33.649 61.239,34.493 62.001,34.493 62.916,35.408 62.916,36.627 62.916,38.049 63.881,39.014 86.716,39.014 87.376,39.675 87.376,40.809 v1(87.918,41.351) ; v1(60.253,34.37) 60.782,34.9 61.646,34.9 62.433,35.687 62.433,38.252 63.678,39.497 86.436,39.497 86.868,39.929 86.868,40.911 v1(86.428,41.351)
  Mid-Layer 2 w0.254: v1(15.729,0.977) 14.715,1.99 14.715,5.569 14.715,6.287 16.135,7.707 17.108,7.707 17.617,7.707 v1(18.195,7.129) ; v1(17.009,28.521) 20.582,28.521 21.584,27.519 21.584,20.763 ; v1(18.546,21.382) 19.578,22.414 v1(19.578,26.538) ; v1(20.176,27.04) 20.578,26.638 20.578,20.392 15.877,15.691 15.877,11.81 19.731,7.956 20.31,7.956 v1(22.185,6.08) ; 21.584,15.193 21.584,20.763 ; v1(22.138,14.028) 21.584,14.582 21.584,20.763 ; v1(22.373,12.642) 22.373,12.948 24.915,15.489 24.915,18.462 26.151,19.698 v1(26.151,24.317) ; v1@22.648,31.302 22.648,28.94 23.842,27.747 v1(23.842,20.475) ; v1(22.687,14.643) 22.328,15.003 22.328,22.921 v1(22.812,23.405) ; v1(24.63,20.8) 24.63,30.479 25.42,31.27 ; 25.695,31.544 25.42,31.27 ; v1(26.159,32) 26.15,32 25.42,31.27 ; v1(26.502,13.567) 26.502,15.564 26.028,16.037 26.028,17.187 26.856,18.015 v1(26.856,26.189) ; v1(26.979,17.133) 27.372,17.526 27.372,21.946 32.127,26.701 32.127,28.64 33.341,29.854 34.633,29.854 v1(34.87,29.617) ; v1(28.217,17.025) 28.217,20.254 33.907,25.944 v1(33.907,29.055) ; v1(34.432,23.809) 33.86,23.236 33.86,20.599 34.929,19.53 v1(34.929,6.819) ; v1(35.303,4.554) 37.44,6.691 v1(37.44,18.04) ; v1(60.122,36.551) 60.122,40.818 61.341,42.037 82.956,42.037 83.363,42.443 84.912,42.443 v1(84.938,42.418) ; v1(63.276,21.819) 63.276,23.465 62.662,24.079 62.662,29.972 63.276,30.586 63.398,30.709 v1(63.779,31.09) ; v1(64.414,27.483) 65.272,28.341 71.435,28.341 72.003,27.773 72.003,21.017 ; v1(66.148,1.231) 65.134,2.244 65.134,5.823 65.134,6.541 66.554,7.961 67.527,7.961 68.036,7.961 v1(68.614,7.383) ; v1(70.595,27.294) 70.997,26.892 70.997,20.646 66.296,15.945 66.296,12.064 72.025,6.334 v1(72.604,6.334) ; 72.003,15.447 72.003,21.017 ; v1(72.557,14.282) 72.003,14.836 72.003,21.017 ; v1@72.747,22.098 72.747,15.257 v1(73.106,14.897) ; v1(72.792,12.896) 72.792,13.202 75.334,15.743 75.334,16.202 77.216,18.085 77.216,23.925 v1(76.57,24.571) ; v1(75.846,20.863) 75.846,26.926 76.175,27.254 78.435,27.254 v1(79.019,26.67) ; v1(77.398,17.387) 77.791,17.78 77.791,22.2 82.546,26.955 82.546,29.409 83.947,30.81 86.385,30.81 87.554,29.642 v1(87.554,29.439) ; v1(78.636,17.279) 78.636,20.508 81.915,23.787 81.915,25.07 85.09,28.245 v1(85.09,30.048) ; v1(84.851,24.063) 84.279,23.49 84.279,21.438 84.279,13.21 85.348,12.141 v1(85.348,7.073) ; v1(85.722,4.808) 87.859,6.945 v1(87.859,18.294)
  Mid-Layer 2 w0.381: v1(39.867,26.734) 40.744,26.734 41.355,26.123 41.355,19.588 v1(41.905,19.038)
  Mid-Layer 2 w0.508: v2(1.627,7.559) 1.627,8.394 2.14,8.906 8.497,8.906 9.691,10.1 9.691,15.981 10.384,16.674 v2(11.4,17.69) ; v2(15.609,5.294) 17.129,5.294 18.501,3.921 21.474,3.921 22.796,2.599 22.796,1.138 v1(23.164,0.77) v1(24.769,2.375) 24.769,5.788 v1(24.332,6.225) 17.685,12.872 ; 21.587,9.356 v1(21.813,9.582) ; v1(29.082,12.574) 29.838,13.33 29.838,17.443 v1(29.309,17.972) ; v2(52.046,7.813) 52.046,8.648 52.559,9.16 58.916,9.16 60.11,10.354 60.11,16.235 60.803,16.928 v2(61.819,17.944) ; v2(66.028,5.548) 67.548,5.548 68.92,4.175 71.893,4.175 73.215,2.853 73.215,1.392 v1(73.583,1.024) v1(75.188,2.629) 75.188,6.042 v1(74.751,6.479) 68.405,12.825 68.104,13.126 v1(68.104,13.461) ; 72.006,9.61 v1(72.232,9.836) ; v1(79.501,12.828) 80.257,13.584 80.257,17.697 v1(79.728,18.226)
  Mid-Layer 2 w0.762: v2(1.391,14.176) 4.655,17.44 4.655,18.909 6.817,21.071 7.933,22.187 9.821,22.187 v2(10.941,21.067) ; v2(51.81,14.43) 55.074,17.694 55.074,19.163 57.232,21.321 v2(61.36,21.321)
  Mid-Layer 2 w1.016: v3(2.678,22.485) 2.678,23.41 7.847,28.579 11.033,28.579 13.515,26.097 v3(13.515,16.986) ; v3(5.927,6.373) 7.245,5.055 v3(12.047,5.055) 12.047,6.253 13.54,7.746 v3@13.54,16.96 ; v3(53.097,22.739) 53.097,23.664 56.639,27.207 60.603,27.207 61.747,26.062 61.747,23.006 62.376,22.377 62.376,20.234 63.934,18.676 v3(63.934,17.24) ; v3(56.346,6.627) 57.664,5.309 v3(62.466,5.309) 62.466,6.507 63.959,8 v3@63.959,17.214
  Bottom Layer w0.127: 8.25,9.869 8.25,9.483 8.641,9.091 9.682,9.091 v1(10.156,8.618) ; 8.75,9.869 9.25,9.869 10.068,9.869 v1(10.78,9.157) ; 8.75,12.069 8.805,12.125 v1(8.805,12.982) ; 58.669,10.123 58.669,9.737 59.06,9.345 60.101,9.345 v1(60.575,8.872) ; 59.169,10.123 59.669,10.123 60.487,10.123 v1(61.199,9.411) ; 59.169,12.323 59.224,12.379 v1(59.224,13.236)
  Bottom Layer w0.152: v1(2.483,7.739) 3.002,7.22 ; 25.235,10.406 25.235,9.12 25.694,9.12 v1(26.08,9.506) ; 31.541,8.3 33.135,8.3 33.579,8.744 v1(33.579,10.375) ; 31.541,13.38 v1(32.986,13.38) ; 31.541,14.65 v1(32.986,14.65) ; v1(38.806,7.03) 40.691,7.03 ; v1(38.887,5.789) 38.916,5.76 40.691,5.76 ; v1(52.902,7.993) 53.421,7.474 ; 75.654,10.66 75.654,9.374 76.113,9.374 v1(76.499,9.76) ; 81.96,8.554 83.554,8.554 83.998,8.998 v1(83.998,10.629) ; 81.96,13.634 v1(83.405,13.634) ; 81.96,14.904 v1(83.405,14.904) ; v1(89.225,7.284) 91.11,7.284 ; v1(89.306,6.043) 89.335,6.014 91.11,6.014
  Bottom Layer w0.203: 1.317,15.249 1.966,15.249 2.736,14.479 ; 1.317,16.249 1.932,15.633 3.547,15.633 4.329,16.415 5.505,16.415 6.461,15.459 8.225,13.695 10.716,13.695 v1(11.116,13.294) ; 1.595,13.107 1.568,13.107 ; 1.724,13.263 1.595,13.134 1.568,13.107 ; v1(2.252,6.82) 3.002,6.82 ; 2.794,13.263 2.612,13.08 1.595,13.08 1.568,13.107 ; 3.901,22.482 3.901,21.249 3.423,20.771 3.794,20.4 3.794,18.623 7.372,15.045 8.303,14.113 11.252,14.113 v1(11.691,13.674) ; 4.361,23.707 4.361,25.579 4.462,25.679 ; 4.637,18.873 4.637,18.751 v1(6.529,16.859) ; v1(7.222,16.27) 7.712,16.761 8.139,16.761 ; 7.75,12.069 v1(7.75,13.017) ; 8.139,15.211 v1(8.139,15.894) ; 8.25,10.969 8.25,12.069 ; 9.139,16.761 9.139,15.211 9.63,15.211 9.869,15.45 12.438,15.45 12.829,15.841 13.52,15.841 ; 9.25,12.069 v1(10.491,12.069) 11.613,12.069 11.737,12.194 ; 14.259,28.521 14.344,28.605 14.344,30.25 ; 15.253,15.427 14.774,14.948 14.774,12.485 15.355,11.904 18.77,11.904 19.983,11.904 20.736,12.657 21.286,12.657 22.643,11.301 23.441,11.301 23.696,11.556 24.299,11.556 ; 15.761,15.427 15.754,15.42 15.754,14.148 15.817,14.085 15.817,12.839 ; 16.261,15.427 18.036,15.427 18.524,14.939 18.524,14.215 18.535,14.226 19.799,14.226 ; v1(16.817,11.911) 16.817,12.839 ; v1@17.694,13.215 18.524,13.215 ; 18.578,28.331 18.757,28.51 18.757,29.836 ; v1(21.813,9.582) 22.645,10.413 24.228,10.413 ; 22.446,24.732 22.446,26.338 22.949,26.841 25.185,26.841 26.787,25.239 29.771,25.239 30.472,24.538 v2(30.472,23.636) ; 22.457,29.855 22.474,29.838 22.474,28.514 ; 24.314,15.348 24.314,16.77 v2@25.866,18.321 ; 28.226,37.371 30.64,37.371 30.752,37.483 ; 28.226,38.641 30.646,38.641 30.822,38.817 ; 28.674,26.189 28.674,27.388 28.662,27.4 29.088,27.826 29.088,28.845 ; v1(29.891,35.922) 30.102,36.133 30.714,36.133 ; v1(30.328,26.863) 31.468,28.004 31.914,28.004 ; 31.562,32.297 31.562,33.548 31.622,33.608 32.139,33.608 v1(32.397,33.349) ; 31.914,27.004 31.932,26.986 33.033,26.986 ; 32.143,23.766 32.096,23.813 32.096,25.125 34.012,25.125 35.096,26.21 36.634,26.21 36.851,25.993 36.851,25.411 ; 33.143,21.266 33.143,20.517 33.563,20.097 34.543,20.097 35.41,20.964 35.41,21.409 37.843,23.842 39.141,23.842 ; v1(38.925,15.455) 39.73,14.65 40.691,14.65 ; 39.223,23.923 39.223,25.499 ; 40.109,19.614 40.141,19.646 40.141,21.342 ; 51.736,15.503 52.385,15.503 53.155,14.733 ; 51.736,16.503 52.351,15.887 53.966,15.887 54.748,16.669 55.924,16.669 56.88,15.713 58.644,13.949 61.135,13.949 v1(61.535,13.548) ; 52.014,13.361 51.987,13.361 ; 52.143,13.517 52.014,13.388 51.987,13.361 ; v1(52.671,7.074) 53.421,7.074 ; 53.213,13.517 53.031,13.334 52.014,13.334 51.987,13.361 ; 54.32,22.736 54.32,21.503 53.842,21.025 54.213,20.654 54.213,18.877 57.791,15.299 58.722,14.367 61.671,14.367 v1(62.11,13.928) ; 54.78,23.961 54.78,25.833 54.881,25.933 ; 55.056,19.127 55.056,19.005 v1(56.948,17.113) ; 55.736,9.145 55.736,10.448 56.363,11.074 58.52,11.074 58.669,11.223 58.669,12.323 ; v1(57.641,16.524) 58.131,17.015 58.558,17.015 ; 58.169,12.323 v1(58.169,13.271) ; 58.558,15.465 v1(58.558,16.148) ; 59.558,17.015 59.558,15.465 60.049,15.465 60.288,15.704 62.857,15.704 63.248,16.095 63.939,16.095 ; 59.669,12.323 v1(60.91,12.323) 62.032,12.323 62.156,12.448 ; 64.678,28.775 64.763,28.859 64.763,30.504 ; 65.672,15.681 65.193,15.202 65.193,12.739 65.774,12.158 69.189,12.158 70.402,12.158 71.155,12.911 71.705,12.911 73.062,11.555 73.86,11.555 74.115,11.81 74.718,11.81 ; 66.18,15.681 66.173,15.674 66.173,14.402 66.236,14.339 66.236,13.093 ; 66.68,15.681 68.455,15.681 68.943,15.193 68.943,14.469 68.954,14.48 70.218,14.48 ; v1(67.236,12.165) 67.236,13.093 ; v1@68.113,13.469 68.943,13.469 ; 68.997,28.585 69.176,28.764 69.176,30.09 ; v1(72.232,9.836) 73.064,10.667 74.647,10.667 ; 72.865,24.986 72.865,26.592 73.425,27.153 75.895,27.153 79.883,27.153 80.891,26.145 v2(80.891,23.89) ; 72.876,30.109 72.893,30.092 72.893,28.768 ; 74.733,15.602 74.733,17.024 v2@76.285,18.575 ; 82.562,24.02 82.515,24.067 82.515,25.746 83.49,26.721 87.224,26.721 ; 83.562,21.52 83.562,20.771 83.982,20.351 84.962,20.351 85.829,21.218 85.829,21.663 88.262,24.096 89.56,24.096 ; 84.944,36.964 85.071,36.964 85.928,36.964 87.358,36.964 87.471,37.077 ; 84.944,38.234 85.071,38.234 86.258,38.234 87.364,38.234 87.54,38.41 ; v1(86.61,35.515) 86.82,35.726 87.433,35.726 ; 87.27,25.665 87.27,26.675 87.224,26.721 ; 88.28,31.89 88.28,33.142 88.341,33.202 ; v1(89.344,15.709) 90.149,14.904 91.11,14.904 ; 89.642,24.177 89.642,25.753 ; v1(89.891,31.166) 89.891,27.762 88.849,26.721 87.224,26.721 ; 90.528,19.868 90.56,19.9 90.56,21.596
  Bottom Layer w0.254: 1.568,12.107 1.95,12.107 2.794,11.263 3.426,11.263 4.033,11.869 4.033,15.002 4.511,15.479 5.236,15.479 ; v1(1.634,23.622) 1.862,23.394 2.421,23.394 2.87,23.843 3.393,23.843 ; 1.893,37.903 v1(2.572,37.224) ; 2.6,38.61 3.136,38.074 v1(3.136,37.845) ; 2.632,4.762 2.632,5.376 ; v2@3.317,7.59 3.402,7.506 3.402,7.22 ; 3.402,6.146 3.402,6.82 ; 3.802,7.22 5.317,8.736 5.317,8.891 ; 4.401,22.482 4.677,22.482 5.038,22.843 5.54,22.843 5.603,22.906 6.829,22.906 ; 4.637,19.873 4.637,20.472 5.121,20.957 6.08,20.957 ; 5.594,22.707 5.664,22.777 ; 6.829,23.906 6.829,25.312 6.462,25.679 v1(7.645,25.679) ; 7.156,18.457 8.785,18.457 9.633,19.305 9.633,20.957 9.633,21.982 10.172,22.521 10.564,22.521 ; v1(8.071,17.919) 7.535,17.383 7.002,17.383 6.172,18.212 6.172,19.097 7.138,20.063 7.138,21.412 7.687,21.961 7.687,23.92 8.544,24.776 8.544,28.897 10.023,30.376 11.09,30.376 ; 8.156,20.957 8.156,22.84 v1(8.727,23.411) ; v1(9.711,24.949) 9.953,25.191 10.782,25.191 ; 11.782,25.191 11.782,26.289 11.697,26.374 12.09,26.767 12.09,27.876 ; v1(12.407,17.889) 12.407,19.885 15.888,23.366 19.709,23.366 21.111,24.768 21.111,26.221 22.422,27.532 24.148,27.532 24.474,27.858 24.474,28.514 ; v1(12.424,21.132) 15.238,23.946 15.238,24.65 15.259,24.671 15.259,26.021 ; 14.238,24.65 14.238,26.434 14.981,27.177 16.225,27.177 16.949,26.453 16.949,25.063 17.484,24.528 18.508,24.528 18.508,26.957 19.757,28.206 19.757,29.836 19.675,29.919 19.675,31.334 ; 15.344,30.25 17.4,30.25 18.484,31.334 19.675,31.334 ; v1(16.067,20.53) 17.832,22.294 24.184,22.294 25.427,21.051 v1(25.427,20.609) ; 16.259,28.521 v1(17.009,28.521) ; 16.754,14.148 v1(16.754,14.832) ; v1(18.891,40.485) 19.591,39.784 20.353,39.784 ; v1(19.008,36.157) 19.13,36.034 20.353,36.034 ; v1(19.041,37.265) 19.06,37.284 20.353,37.284 ; 19.508,24.528 19.578,24.598 19.578,25.831 v1(19.578,26.538) ; v1(19.799,12.547) 19.799,13.226 ; v1(20.176,27.04) 20.578,27.442 20.578,28.331 ; v1(22.475,38.641) 23.276,38.641 ; v1(22.518,9.12) 23.058,9.12 ; v1(22.562,37.371) 23.276,37.371 ; v1@22.736,9.12 23.058,9.12 ; v1(22.812,23.405) 23.446,24.039 23.446,24.732 23.474,24.76 23.474,26.014 ; 23.117,20.072 23.439,20.072 v1(23.842,20.475) v1@23.856,20.489 ; v1(23.268,12.665) 23.268,13.514 23.749,13.994 23.899,13.994 ; 23.457,29.855 23.457,30.543 v1(22.666,31.334) 19.675,31.334 ; 23.824,13.92 23.899,13.994 ; 24.235,9.12 23.058,9.12 ; 24.283,12.775 24.283,13.611 23.899,13.994 ; 24.299,13.994 23.899,13.994 ; v1(25.241,11.956) 25.241,12.733 25.283,12.775 25.283,13.978 25.299,13.994 ; v1(26.159,32) 26.813,31.345 28.088,31.345 ; v1(26.856,26.189) 27.674,26.189 ; 27.996,18.462 27.996,18.158 v1(29.022,17.133) ; 29.496,20.783 v1(30.119,21.406) ; v1(29.515,35.319) 29.895,34.94 30.68,34.94 30.68,33.666 30.622,33.608 ; v1(29.985,28.42) 35.094,33.529 v1@35.094,34.803 ; 31.143,21.266 31.143,21.965 31.918,22.74 35.923,22.74 38.223,25.039 38.223,25.499 ; 31.68,34.94 33.497,34.94 33.58,35.023 33.52,35.083 33.52,36.538 ; 31.714,36.133 31.752,36.171 v1(31.752,36.804) 31.752,37.483 ; 31.758,40.244 31.822,40.18 v1(31.822,39.54) 31.822,38.817 ; v1(32.774,34.023) 33.58,34.023 ; 33.52,37.538 v1(33.52,38.231) ; v1@34.467,23.79 35.569,23.79 35.569,24.66 35.851,24.941 35.851,25.411 ; 34.569,21.29 v1@34.569,22.098 ; 35.553,19.597 35.639,19.683 v1(35.639,20.349) ; 36.553,19.597 36.569,19.613 36.569,21.29 ; v1(37.44,18.04) 38.362,18.04 39.109,18.787 39.109,19.614 ; 51.987,12.361 52.369,12.361 53.213,11.517 53.845,11.517 54.452,12.123 54.452,15.256 54.93,15.733 55.655,15.733 ; v1(52.053,23.876) 52.281,23.648 52.84,23.648 53.289,24.097 53.812,24.097 ; 53.051,5.016 53.051,5.63 ; v2@53.736,7.844 53.821,7.76 53.821,7.474 ; 53.821,6.4 53.821,7.074 ; 54.221,7.474 55.736,8.99 55.736,9.145 ; 54.82,22.736 55.096,22.736 55.457,23.097 55.959,23.097 56.022,23.16 57.248,23.16 ; 55.056,20.127 55.056,20.726 55.54,21.211 56.499,21.211 ; 56.013,22.961 56.083,23.031 ; 57.248,24.16 57.248,25.566 56.881,25.933 v1(58.064,25.933) ; 57.575,18.711 59.204,18.711 60.052,19.559 60.052,21.211 60.052,22.236 60.591,22.775 60.983,22.775 ; 58.575,21.211 58.575,23.094 v1(59.146,23.665) ; v1(58.963,25.03) 58.963,29.151 60.442,30.63 61.509,30.63 ; v1(60.13,25.203) 60.372,25.445 61.201,25.445 ; 62.201,25.445 62.201,26.543 62.116,26.628 62.509,27.021 62.509,28.13 ; v1(63.276,21.819) 63.276,23.55 63.678,23.952 64.705,23.952 65.657,24.904 65.678,24.925 65.678,26.275 ; v1(64.414,27.483) 64.745,27.483 66.036,28.775 66.678,28.775 ; 64.657,24.904 64.657,26.688 65.4,27.431 66.644,27.431 67.368,26.707 67.368,25.317 67.903,24.782 68.927,24.782 ; 65.763,30.504 67.819,30.504 68.903,31.588 70.094,31.588 ; 67.173,14.402 v1(67.173,15.086) ; v1(67.818,22.301) 67.818,23.089 68.927,24.198 68.927,24.782 ; v2(69.809,40.386) 69.809,41.361 70.053,41.605 72.492,41.605 73.822,40.275 75.235,40.275 ; v1(69.952,22.454) 69.927,22.478 69.927,24.782 69.997,24.852 69.997,26.085 ; v1(70.218,12.801) 70.218,13.48 ; v1(70.595,27.294) 70.997,27.696 70.997,28.585 ; v2(70.909,40.386) 70.909,37.625 72.009,36.525 75.235,36.525 ; v2(72.009,40.386) 72.009,38.862 73.096,37.775 75.235,37.775 ; v1(72.746,22.098) 73.865,23.218 73.865,24.986 73.893,25.014 73.893,26.268 ; v1(72.937,9.374) 73.477,9.374 ; v1@73.155,9.374 73.477,9.374 ; 73.536,20.326 73.858,20.326 v1(74.261,20.729) ; v1(73.687,12.919) 73.687,13.768 74.168,14.248 74.318,14.248 ; 73.876,30.109 73.876,30.797 73.085,31.588 70.094,31.588 ; 74.243,14.174 74.318,14.248 ; 74.654,9.374 73.477,9.374 ; 74.702,13.029 74.702,13.865 74.318,14.248 ; 74.718,14.248 74.318,14.248 ; 74.893,28.768 76.977,28.768 77.749,29.54 77.749,32.741 78.308,33.299 v1(79.781,33.299) ; v1(75.66,12.21) 75.66,12.987 75.702,13.029 75.702,14.232 75.718,14.248 ; 78.415,18.716 78.415,18.412 v1(79.441,17.387) ; v1(79.193,38.234) 80.121,38.234 ; v1(79.28,36.964) 80.121,36.964 ; 79.915,21.037 v1(80.538,21.66) ; 81.562,21.52 81.562,22.219 82.337,22.994 86.342,22.994 88.642,25.293 88.642,25.753 ; v1@84.886,24.044 85.988,24.044 85.988,24.914 86.27,25.195 86.27,25.665 ; 84.988,21.544 v1@84.988,22.352 ; 85.972,19.851 86.058,19.937 v1(86.058,20.603) ; v1(86.462,33.249) 86.508,33.202 87.341,33.202 87.398,33.259 87.398,34.533 ; 86.972,19.851 86.988,19.867 86.988,21.544 ; v1(87.859,18.294) 88.781,18.294 89.528,19.041 89.528,19.868 ; 88.398,34.533 90.215,34.533 90.299,34.617 90.238,34.677 90.238,36.132 ; 88.433,35.726 88.471,35.764 88.471,37.077 ; 88.476,39.838 88.54,39.774 v1(88.54,39.133) 88.54,38.41 ; v1(89.492,33.617) 90.299,33.617 ; 90.238,37.132 v1(90.238,37.825) ; 6.08,20.957 6.118,20.918 6.156,20.957 6.08,20.957 ; 56.499,21.211 56.537,21.172 56.575,21.211 56.499,21.211 ; 68.927,24.782 68.927,27.211 70.176,28.46 70.176,30.09 70.094,30.173 70.094,31.588
  Bottom Layer w0.381: 1.119,10.897 1.578,10.438 3.261,10.438 3.47,10.438 4.276,10.438 5.294,11.457 5.294,12.263 ; 3.953,6.669 4.532,6.09 4.532,4.762 ; 6.425,12.336 6.691,12.069 7.25,12.069 ; 7.25,9.216 7.25,9.869 ; 14.129,9.697 14.129,6.087 14.923,5.294 v2(15.609,5.294) ; 15.7,18.422 15.7,17.336 15.761,17.275 15.761,16.787 ; v1(16.422,40.552) 17.509,41.639 19.748,41.639 20.353,41.034 ; 19.912,5.22 19.912,7.404 ; 28.226,36.101 28.226,33.631 29.561,32.297 30.562,32.297 ; 51.538,11.151 51.997,10.692 53.68,10.692 53.889,10.692 54.695,10.692 55.713,11.711 55.713,12.517 ; 54.372,6.923 54.951,6.344 54.951,5.016 ; 56.844,12.59 57.11,12.323 57.669,12.323 ; 57.669,9.47 57.669,10.123 ; 64.548,9.951 64.548,6.341 65.342,5.548 v2(66.028,5.548) ; 66.119,18.676 66.119,17.59 66.18,17.529 66.18,17.041 ; v2(68.709,40.386) 68.709,41.887 69.545,42.723 74.574,42.723 75.235,42.062 75.235,41.525 ; 70.331,5.474 70.331,7.658 ; v1(85.895,35.694) 84.944,35.694 84.944,33.225 86.279,31.89 87.28,31.89
  Bottom Layer w0.508: 1.283,34.833 2.68,34.833 6.231,34.833 6.371,34.972 ; v2(1.391,14.176) 1.595,13.972 1.595,13.134 1.595,13.107 1.595,13.08 ; 1.523,22.482 1.544,22.482 ; v2@3.317,7.59 3.317,8.891 ; 6.739,8.705 7.25,9.216 ; 18.912,4.806 19.254,4.463 22.149,4.463 25.317,4.463 v1(25.89,5.036) ; 23.468,7.089 23.468,7.404 24.332,6.54 ; v2(26.485,2.329) 26.485,3.219 30.296,7.03 31.541,7.03 33.019,7.03 34.544,5.505 34.544,3.386 ; 27.679,24.417 27.679,23.278 27.595,23.195 26.996,22.596 26.996,21.783 29.309,19.47 v1(29.309,17.972) ; v2(30.472,23.636) 32.012,23.636 32.143,23.766 ; 51.702,35.087 53.099,35.087 56.65,35.087 56.79,35.226 ; v2(51.81,14.43) 52.014,14.226 52.014,13.388 52.014,13.361 52.014,13.334 ; 51.942,22.736 51.963,22.736 ; v2@53.736,7.844 53.736,9.145 ; 57.158,8.959 57.669,9.47 ; 69.331,5.06 69.673,4.717 72.568,4.717 75.736,4.717 v1(76.309,5.29) ; 73.887,7.343 73.887,7.658 74.751,6.794 ; v2(76.904,2.583) 76.904,3.473 80.715,7.284 81.96,7.284 83.438,7.284 84.963,5.759 84.963,3.64 ; 78.098,24.671 78.098,23.532 78.014,23.449 77.415,22.85 77.415,22.037 79.728,19.724 v1(79.728,18.226) ; v2(80.891,23.89) 82.431,23.89 82.562,24.02
  Bottom Layer w0.762: 2.632,5.376 3.402,6.146 ; 10.633,18.457 v2(11.4,17.69) ; v2(10.941,21.067) 11.523,21.067 ; 11.564,21.026 11.564,22.521 ; 14.425,1.304 14.425,2.335 15.603,3.513 ; 19.561,18.321 v2@25.866,18.321 ; v2(25.925,18.381) 26.996,19.452 ; 26.996,18.462 26.996,19.452 ; 26.996,19.783 26.996,19.452 ; v2(30.208,19.852) 31.143,20.787 31.143,21.266 ; 53.051,5.63 53.821,6.4 ; 61.052,18.711 v2(61.819,17.944) ; v2(61.36,21.321) 61.942,21.321 ; 61.983,21.28 61.983,22.775 ; 64.844,1.558 64.844,2.589 66.022,3.767 ; 69.98,18.575 v2@76.285,18.575 ; v2(76.344,18.635) 77.415,19.706 ; 77.415,18.716 77.415,19.706 ; 77.415,20.037 77.415,19.706 ; v2@81.188,18.856 81.562,19.23 81.562,21.52
  Bottom Layer w1.016: 1.523,22.482 1.544,22.482 v3@3.027,22.482 ; 4.532,4.762 v3@5.927,6.156 ; v3(5.927,6.373) v3@5.927,6.156 ; 6.425,12.336 v3(6.425,13.072) ; 6.895,8.876 6.739,8.721 6.739,8.705 6.739,6.969 v3@5.927,6.156 ; v3(12.047,5.055) 12.047,3.513 12.12,3.441 12.12,1.355 ; 13.52,15.841 13.515,15.847 v3(13.515,16.986) 13.515,18.137 13.8,18.422 ; 51.942,22.736 51.963,22.736 v3@53.446,22.736 ; 54.951,5.016 v3@56.346,6.41 ; v3(56.346,6.627) v3@56.346,6.41 ; 56.844,12.59 v3(56.844,13.326) ; 57.314,9.13 57.158,8.975 57.158,8.959 57.158,7.223 v3@56.346,6.41 ; v3(62.466,5.309) 62.466,3.767 62.539,3.695 62.539,1.609 ; 63.939,16.095 63.934,16.101 v3(63.934,17.24) 63.934,18.391 64.219,18.676
  Bottom Layer w1.27: 7.707,5.81 9.312,4.204 ; 8.912,8.049 8.968,8.049 9.766,7.251 ; 9.312,4.117 9.312,4.204 ; 9.399,1.508 9.399,4.117 9.312,4.204 ; v3(10.444,7.251) 12.153,7.251 ; 58.126,6.064 59.731,4.458 ; 59.331,8.303 59.387,8.303 60.185,7.505 ; 59.731,4.371 59.731,4.458 ; 59.818,1.762 59.818,4.371 59.731,4.458 ; v3(60.863,7.505) 62.572,7.505
  other v1: 17.213,0.921 10.82,1.125 67.632,1.175 76.2,1.321 77.546,1.346 61.239,1.379 4.826,1.473 54.483,1.829 16.993,2.54 4.699,2.743 55.575,2.845 7.747,3.683 1.245,4.089 16.942,4.089 88.087,4.115 39.04,4.216 90.068,4.216 37.795,4.267 40.869,4.369 57.048,4.369 67.259,4.42 51.41,4.47 91.897,4.47 77.038,5.283 63.754,5.563 36.449,7.112 18.415,8.204 68.529,8.484 36.144,8.839 0.674,9.266 51.093,9.52 19.66,9.779 29.489,9.804 79.781,10.033 70.079,10.084 18.694,10.82 7.75,10.969 68.936,11.024 58.169,11.223 29.439,11.43 79.553,11.786 5.334,13.843 34.036,13.995 6.756,14.249 57.48,14.275 28.905,14.503 56.54,14.529 35.992,14.554 79.4,14.681 40.792,15.875 32.41,15.926 36.144,16.078 28.727,16.129 26.949,16.18 77.013,16.231 79.223,16.307 12.014,16.535 90.272,16.764 81.509,17.348 2.309,17.617 89.383,17.805 9.672,17.844 52.728,17.871 85.065,17.932 60.091,18.098 90.729,18.364 82.499,18.466 56.566,18.567 86.055,18.644 92.202,19.253 88.341,19.456 74.828,19.609 60.731,19.736 57.125,19.939 87.909,20.396 65.227,20.447 63.906,20.803 14.884,20.879 75.032,21.133 66.192,21.463 64.821,21.488 73.787,21.717 55.499,22.174 88.494,23.114 11.1,24.155 58.191,24.333 91.846,24.74 59.766,26.035 91.567,26.238 26.264,27.508 35.682,27.792 80.645,28.042 37.287,28.375 38.636,28.511 58.217,28.626 25.883,28.854 57.277,29.616 65.938,29.693 91.211,30.556 52.451,30.683 37.359,30.843 51.435,30.861 12.268,31.14 80.67,31.191 16.612,31.267 60.096,31.547 91.999,31.648 73.609,31.979 11.125,32.131 91.364,32.131 24.46,32.156 22.352,32.512 51.587,32.639 26.645,33.02 14.859,33.172 37.015,33.23 41.504,33.299 80.594,33.426 39.579,33.669 22.53,33.782 67.361,33.833 68.885,33.884 92.354,34.239 14.834,34.722 68.936,34.95 67.589,35.103 41.326,35.23 92.456,35.763 36.1,35.891 37.59,35.891 2.134,36.195 14.783,36.195 0.889,36.22 51.943,36.474 3.175,36.551 53.264,36.601 59.004,36.881 66.345,36.957 92.456,37.313 82.596,37.599 14.834,37.668 52.4,37.668 53.365,37.821 51.537,38.608 40.437,38.71 14.783,38.862 52.705,38.913 35.306,39.522 37.389,39.675 78.384,40.157 14.834,40.284 61.163,40.462 90.221,40.462 34.036,40.564 38.786,41.377 35.103,41.402 78.765,41.478 32.664,41.885
  other v2: 16.536,22.357 64.414,22.657 66.446,22.657 65.481,22.682 9.184,27.198 17.432,27.304 9.737,31.044 13.748,31.064 4.138,33.501 54.762,33.579 4.152,34.469 8.839,34.634 54.762,34.671 4.022,35.367 16.658,38.433 8.858,38.561
  other v3: 7.284,2.002 57.703,2.256

## Polygon pours and split planes (outlines as drawn)
no net on Top Layer "Mid-Layer 1-No Net" (solid, remove dead copper, pour order 1000): 46.534,46.585 46.776,46.827 99.299,46.827 99.299,3.355 95.824,-0.12 93.885,-2.059 57.362,-2.059 47.423,-2.059 45.322,0.042 47.18,1.9 47.18,46.908
no net on Top Layer "Mid-Layer 1-No Net" (solid, remove dead copper, pour order 1000): -4.874,44.879 -4.632,45.121 47.891,45.121 47.891,1.649 44.416,-1.826 42.477,-3.765 5.954,-3.765 -3.985,-3.765 -6.086,-1.664 -4.228,0.194 -4.228,45.202
no net on Mid-Layer 1 "Mid-Layer 1-No Net" (solid, remove dead copper, pour order 1001): 45.111,45.863 45.353,46.105 97.876,46.105 97.876,2.633 94.401,-0.842 92.462,-2.781 55.939,-2.781 46,-2.781 43.899,-0.68 45.757,1.178 45.757,46.186
no net on Mid-Layer 1 "Mid-Layer 1-No Net" (solid, remove dead copper, pour order 1001): -4.874,44.879 -4.632,45.121 47.891,45.121 47.891,1.649 44.416,-1.826 42.477,-3.765 5.954,-3.765 -3.985,-3.765 -6.086,-1.664 -4.228,0.194 -4.228,45.202
no net on Mid-Layer 2 "Mid-Layer 1-No Net" (solid, remove dead copper, pour order 1002): 45.561,44.945 45.803,45.187 98.326,45.187 98.326,1.715 94.851,-1.76 92.912,-3.699 56.389,-3.699 46.45,-3.699 44.349,-1.598 46.207,0.26 46.207,45.268
no net on Mid-Layer 2 "Mid-Layer 1-No Net" (solid, remove dead copper, pour order 1002): -4.874,44.879 -4.632,45.121 47.891,45.121 47.891,1.649 44.416,-1.826 42.477,-3.765 5.954,-3.765 -3.985,-3.765 -6.086,-1.664 -4.228,0.194 -4.228,45.202
no net on Bottom Layer "Mid-Layer 1-No Net" (solid, remove dead copper, pour order 1003): 45.377,45.133 45.619,45.374 98.142,45.374 98.142,1.902 94.667,-1.573 92.728,-3.511 56.205,-3.511 46.266,-3.511 44.165,-1.411 46.023,0.447 46.023,45.455
no net on Bottom Layer "Mid-Layer 1-No Net" (solid, remove dead copper, pour order 1003): -4.874,44.879 -4.632,45.121 47.891,45.121 47.891,1.649 44.416,-1.826 42.477,-3.765 5.954,-3.765 -3.985,-3.765 -6.086,-1.664 -4.228,0.194 -4.228,45.202

## Keep-outs
Keep-Out Layer:
  circle w0.127: c91.919,1.754 r1.3
  circle w0.127: c51.919,41.754 r1.3
  circle w0.127: c51.919,1.754 r1.3
  circle w0.127: c91.919,41.754 r1.3
  circle w0.127: c41.5,1.5 r1.3
  circle w0.127: c1.5,41.5 r1.3
  circle w0.127: c1.5,1.5 r1.3
  circle w0.127: c41.5,41.5 r1.3
  lines w0.127: 0.1,0.1 0.1,42.9 42.9,42.9 42.9,0.1 0.1,0.1 ; 50.519,0.354 50.519,43.154 93.319,43.154 93.319,0.354 50.519,0.354

## Other copper
Top Layer:
  rectangle: 63.856,22.276 66.904,24.714
  region: 54.077,33.147 55.778,33.147 55.778,36.322 54.077,36.322
  region: 3.658,33.112 6.469,33.112 6.469,35.768 3.658,35.768